# Altium PCB DevKit.PcbDoc (part 1 of 2)
Units mil, origin at the board's own origin, x right, y up, seen from the top; angles counter-clockwise.
Board outline 6000 x 4000 mil, 2 copper layers (Top Layer, Bottom Layer); 69 components, 227 nets, 1587 pads, 0 vias.
Unrouted connection lines stored in the file: 824.
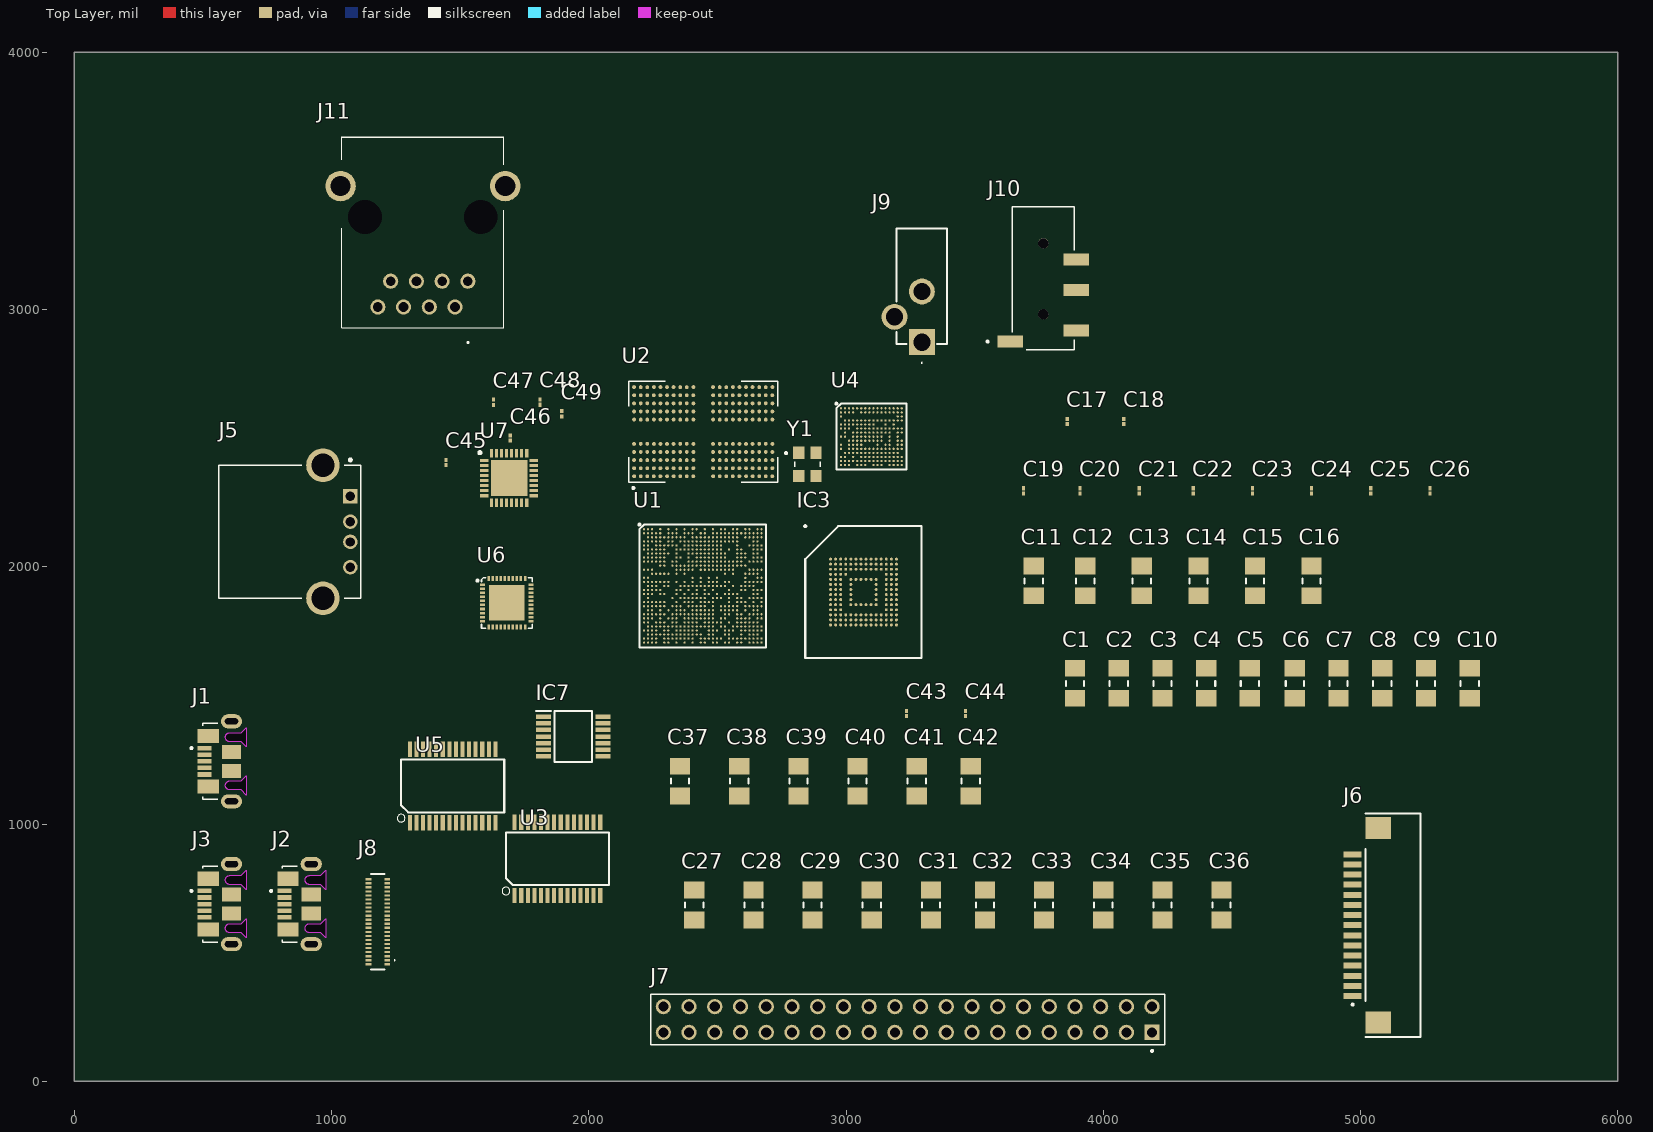
[diagram p0: Top Layer view]
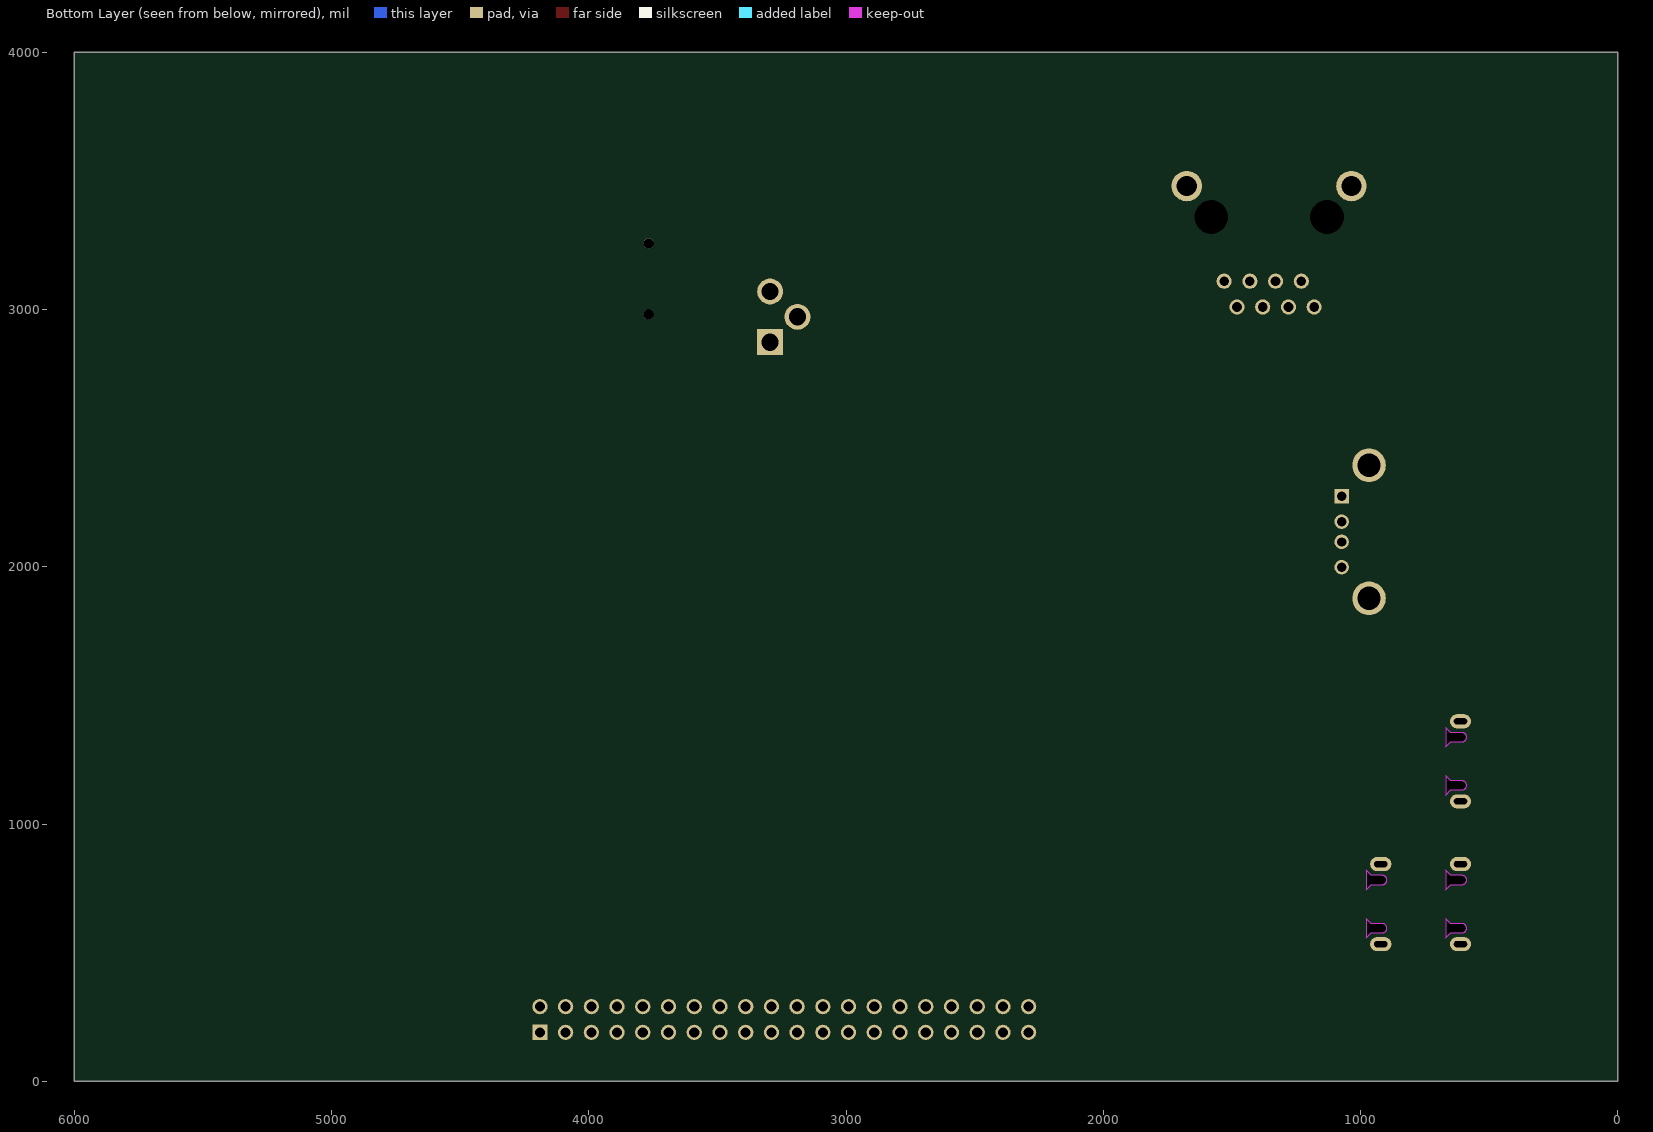
[diagram p1: Bottom Layer view, seen from below]

## Layer stack, top to bottom
Top Solder: solder mask 0.4, Solder Resist, Dk 3.5
Top Layer: signal copper 1.4
Dielectric 1: dielectric 12.6, FR-4, Dk 4.8
Bottom Layer: signal copper 1.4
Bottom Solder: solder mask 0.4, Solder Resist, Dk 3.5

## Board outline
0,0 6000,0 6000,4000 0,4000

## Design rules (kind name [scope] priority, off if disabled: settings)
Clearance [All] p1: gap=10 ignorepadtopadclearanceinfootprint=FALSE except(4: SMDPad-SMDPad)
DiffPairsRouting [All] p1: maxlimit=10 minlimit=10 mostfreqgap=10 toplayer_minwidth=15 toplayer_maxwidth=15 toplayer_prefwidth=15 bottomlayer_minwidth=15 bottomlayer_maxwidth=15 bottomlayer_prefwidth=15 maxuncoupledlength=500
PolygonConnect [All] p1: connectstyle=Relief reliefconductorwidth=10 reliefentries=4 polygonreliefangle="90 Angle" airgapwidth=10
RoutingVias [All] p1: holewidth=28 width=50 viastyle="Through Hole" minholewidth=28 minwidth=50 maxholewidth=28 maxwidth=50
SolderMaskExpansion [All] p1: expansion=4 istentingtop=FALSE
SupplyNets "Schematic Supply Nets_12" [InNet('+5')] p1: voltage=0.000
SupplyNets "Schematic Supply Nets_9" [InNet('AVDD33')] p2: voltage=0.000
SupplyNets "Schematic Supply Nets_18" [InNet('AAVDD28_FM')] p3: voltage=0.000
SupplyNets "Schematic Supply Nets_16" [InNet('AAVDD18_GPS')] p4: voltage=0.000
SupplyNets "Schematic Supply Nets_15" [InNet('VDRAM2')] p5: voltage=0.000
SupplyNets "Schematic Supply Nets_14" [InNet('VDRAM1')] p6: voltage=0.000
SupplyNets "Schematic Supply Nets_11" [InNet('VIO18')] p7: voltage=0.000
SupplyNets "Schematic Supply Nets_10" [InNet('VSRAM_OTHERS')] p8: voltage=0.000
SupplyNets "Schematic Supply Nets_8" [InNet('VEMC')] p9: voltage=0.000
SupplyNets "Schematic Supply Nets_7" [InNet('VPROC')] p10: voltage=0.000
SupplyNets "Schematic Supply Nets_6" [InNet('VMODEM')] p11: voltage=0.000
SupplyNets "Schematic Supply Nets_5" [InNet('VS1')] p12: voltage=0.000
SupplyNets "Schematic Supply Nets_4" [InNet('VPA')] p13: voltage=0.000
SupplyNets "Schematic Supply Nets_3" [InNet('VCORE')] p14: voltage=0.000
SupplyNets "Schematic Supply Nets_2" [InNet('GND')] p15: voltage=0.000
SupplyNets "Schematic Supply Nets_1" [InNet('VSYS')] p16: voltage=0.000
SupplyNets "Schematic Supply Nets" [InNet('EMI0_A0')] p17: voltage=0.000
Width [All] p1: maxlimit=10 minlimit=10 preferedwidth=10
29 further rules are at their usual default settings.

## Classes and differential pairs
component class Connectivity: R?
component class Other: R12
component class "RTC & Miscellaneous Features": C87 C89 R8 R9 R10 R11 Y1
component class "Digital GND": C64 C65 C66 C67 C68 C69 C70 C71 C72 C73 C74 C75 C76 C77 C78 C79 J10 L1 L2 L3 L4 L5 L6 L7 L8 L9 R5 R6 R7
component class Designator: J8
component class USB: J1 J5
component class CAMERA: J6
component class "Control & Interface Signals": R1 R2 S1
component class RJ45: C45 C46 C47 C48 C49 J11 U7
component class Wifi: U6
component class UART: J2 J3 U3 U5
component class Nguồn: J9
component class "Power supply": U4
component class Ground: U2
component class GPIO: IC7 J7
component class ROM: IC3
component class "Power Supply": C1 C2 C3 C4 C5 C6 C7 C8 C9 C10 C11 C12 C13 C14 C15 C16 C17 C18 C19 C20 C21 C22 C23 C24 C25 C26 C27 C28 C29 C30 C31 C32 C33 C34 C35 C36 C37 C38 C39 C40 C41 C42 C43 C44 U1
differential pair USB_1: +USB_1_P -USB_1_N
differential pair USB_0: +USB_0_P -USB_0_N
differential pair USB1: +USB1_P -USB1_N
differential pair USB0: +USB0_P -USB0_N

## Components (designator, comment, footprint, x,y, rotation, side; value= is the part's Value field where it differs from the comment)
C1 "GRM31CR60J107ME39L" CAPC3216X190X55ML30T25 3890,1546.93 r90 top
C2 "GRM31CR60J107ME39L" CAPC3216X190X55ML30T25 4060,1546.93 r90 top
C3 "GRM31CR60J107ME39L" CAPC3216X190X55ML30T25 4230,1546.93 r90 top
C4 "GRM31CR60J107ME39L" CAPC3216X190X55ML30T25 4400,1546.93 r90 top
C5 "GRM31CR60J107ME39L" CAPC3216X190X55ML30T25 4570,1546.93 r90 top
C6 "GRM31CR60J107ME39L" CAPC3216X190X55ML30T25 4745,1546.93 r90 top
C7 "GRM31CR60J107ME39L" CAPC3216X190X55ML30T25 4915,1546.93 r90 top
C8 "GRM31CR60J107ME39L" CAPC3216X190X55ML30T25 5085,1546.93 r90 top
C9 "GRM31CR60J107ME39L" CAPC3216X190X55ML30T25 5255,1546.93 r90 top
C10 "GRM31CR60J107ME39L" CAPC3216X190X55ML30T25 5425,1546.93 r90 top
C11 "GRM31CR60J107ME39L" CAPC3216X190X55ML30T25 3730,1945 r90 top
C12 "GRM31CR60J107ME39L" CAPC3216X190X55ML30T25 3930,1945 r90 top
C13 "GRM31CR60J107ME39L" CAPC3216X190X55ML30T25 4150,1945 r90 top
C14 "GRM31CR60J107ME39L" CAPC3216X190X55ML30T25 4370,1945 r90 top
C15 "GRM31CR60J107ME39L" CAPC3216X190X55ML30T25 4590,1945 r90 top
C16 "GRM31CR60J107ME39L" CAPC3216X190X55ML30T25 4810,1945 r90 top
C17 "GRM033R60J104KE19D" CAPC0603X33X15LL03T05 3860,2565 r90 top
C18 "GRM033R60J104KE19D" CAPC0603X33X15LL03T05 4080,2565 r90 top
C19 "GRM033R60J104KE19D" CAPC0603X33X15LL03T05 3690,2295 r90 top
C20 "GRM033R60J104KE19D" CAPC0603X33X15LL03T05 3910,2295 r90 top
C21 "GRM033R60J104KE19D" CAPC0603X33X15LL03T05 4140,2295 r90 top
C22 "GRM033R60J104KE19D" CAPC0603X33X15LL03T05 4350,2295 r90 top
C23 "GRM033R60J104KE19D" CAPC0603X33X15LL03T05 4580,2295 r90 top
C24 "GRM033R60J104KE19D" CAPC0603X33X15LL03T05 4810,2295 r90 top
C25 "GRM033R60J104KE19D" CAPC0603X33X15LL03T05 5040,2295 r90 top
C26 "GRM033R60J104KE19D" CAPC0603X33X15LL03T05 5270,2295 r90 top
C27 "GRM31CR60J107ME39L" CAPC3216X190X55ML30T25 2410,685 r90 top
C28 "GRM31CR60J107ME39L" CAPC3216X190X55ML30T25 2640,685 r90 top
C29 "GRM31CR60J107ME39L" CAPC3216X190X55ML30T25 2870,685 r90 top
C30 "GRM31CR60J107ME39L" CAPC3216X190X55ML30T25 3100,685 r90 top
C31 "GRM31CR60J107ME39L" CAPC3216X190X55ML30T25 3330,685 r90 top
C32 "GRM31CR60J107ME39L" CAPC3216X190X55ML30T25 3540,685 r90 top
C33 "GRM31CR60J107ME39L" CAPC3216X190X55ML30T25 3770,685 r90 top
C34 "GRM31CR60J107ME39L" CAPC3216X190X55ML30T25 4000,685 r90 top
C35 "GRM31CR60J107ME39L" CAPC3216X190X55ML30T25 4230,685 r90 top
C36 "GRM31CR60J107ME39L" CAPC3216X190X55ML30T25 4460,685 r90 top
C37 "GRM31CR60J107ME39L" CAPC3216X190X55ML30T25 2355,1166.93 r90 top
C38 "GRM31CR60J107ME39L" CAPC3216X190X55ML30T25 2585,1166.93 r90 top
C39 "GRM31CR60J107ME39L" CAPC3216X190X55ML30T25 2815,1166.93 r90 top
C40 "GRM31CR60J107ME39L" CAPC3216X190X55ML30T25 3045,1166.93 r90 top
C41 "GRM31CR60J107ME39L" CAPC3216X190X55ML30T25 3275,1166.93 r90 top
C42 "GRM31CR60J107ME39L" CAPC3216X190X55ML30T25 3485,1166.93 r90 top
C43 "GRM033R60J104KE19D" CAPC0603X33X15LL03T05 3235,1429.76 r90 top
C44 "GRM033R60J104KE19D" CAPC0603X33X15LL03T05 3465,1429.76 r90 top
C45 "GRM033R60J104KE19D" CAPC0603X33X15LL03T05 1445,2405 r90 top
C46 "GRM033R60J104KE19D" CAPC0603X33X15LL03T05 1695,2500.24 r90 top
C47 "GRM033R60J104KE19D" CAPC0603X33X15LL03T05 1630,2639.76 r90 top
C48 "GRM033R60J104KE19D" CAPC0603X33X15LL03T05 1810,2640 r90 top
C49 "GRM033R60J104KE19D" CAPC0603X33X15LL03T05 1895,2594.76 r90 top
IC3 "KLMAG1JETD-B041" BGA153C50P14X14_1150X1300X80 3067.95,1901.73 r0 top
IC7 "TXB0104PWR" SOP65P640X120-14N 1940,1340 r0 top
J1 "1932788-1" TE_1932788-1 560,1245 r90 top
J2 "1932788-1" TE_1932788-1 870,690 r90 top
J3 "1932788-1" TE_1932788-1 560,690 r90 top
J5 "6364372-2" TE_6364372-2 840,2145 r270 top
J6 "ZF1-15-01-X-WT-XX" SAMTEC_ZF1-15-01-X-WT-XX 5095,590 r90 top
J7 "2-826656-0" TE_2-826656-0 3309.67,242.41 r180 top
J8 "WP7B-P040VA1-R8000" WP7BP040VA1R8000 1180,620 r90 top
J9 "DC-002-2.0A-1.0" DC00220A10 3295,2873.15 r270 top
J10 "PJ-320D-A" HRO_PJ-320D-A 3765,3125 r270 top
J11 "RJ45-8Z4" RJ458Z4 1530,3110 r270 top
U1 "MT8365V_BZB" BGA633C40P30X29_1220X1180X90 2443.15,1925.51 r0 top
U2 "K4UBE3D4AA-MGCL" K4F8E304HB-MGCJ 2445,2525 r90 top
U3 "FT232RL" FT232RL 1885,860 r0 top
U4 "MT6358W_A" BGA194C40P16X15_640X600X66 3098.62,2505.75 r0 top
U5 "FT232RL" FT232RL 1477.46,1143.29 r0 top
U6 "MT6631" MT6631 1681.38,1859.49 r0 top
U7 "RTL8201F-VB-CG" RTL8201F 1690,2345 r0 top
Y1 "26MHZ" OSCCC320X250X90N 2850,2395 r0 top

## Footprints (in the part's own frame and the unit in brackets; to place one, negate y for a bottom-side part, rotate by r counter-clockwise, add the part's x,y. Pads: shape width x height; smd on the part's side, far side on the other; paste and mask are expansions set on the pad)
BGA153C50P14X14_1150X1300X80 [mm]
  round 0.29 smd: A1(-3.25,3.25) A2(-2.75,3.25) A3(-2.25,3.25) A4(-1.75,3.25) A5(-1.25,3.25) A6(-0.75,3.25) A7(-0.25,3.25) A8(0.25,3.25) A9(0.75,3.25) A10(1.25,3.25) A11(1.75,3.25) A12(2.25,3.25) A13(2.75,3.25) A14(3.25,3.25) B1(-3.25,2.75) B2(-2.75,2.75) B3(-2.25,2.75) B4(-1.75,2.75) B5(-1.25,2.75) B6(-0.75,2.75) B7(-0.25,2.75) B8(0.25,2.75) B9(0.75,2.75) B10(1.25,2.75) B11(1.75,2.75) B12(2.25,2.75) B13(2.75,2.75) B14(3.25,2.75) C1(-3.25,2.25) C2(-2.75,2.25) C3(-2.25,2.25) C4(-1.75,2.25) C5(-1.25,2.25) C6(-0.75,2.25) C7(-0.25,2.25) C8(0.25,2.25) C9(0.75,2.25) C10(1.25,2.25) C11(1.75,2.25) C12(2.25,2.25) C13(2.75,2.25) C14(3.25,2.25) D1(-3.25,1.75) D2(-2.75,1.75) D3(-2.25,1.75) D4(-1.75,1.75) D12(2.25,1.75) D13(2.75,1.75) D14(3.25,1.75) E1(-3.25,1.25) E2(-2.75,1.25) E3(-2.25,1.25) E5(-1.25,1.25) E6(-0.75,1.25) E7(-0.25,1.25) E8(0.25,1.25) E9(0.75,1.25) E10(1.25,1.25) E12(2.25,1.25) E13(2.75,1.25) E14(3.25,1.25) F1(-3.25,0.75) F2(-2.75,0.75) F3(-2.25,0.75) F5(-1.25,0.75) F10(1.25,0.75) F12(2.25,0.75) F13(2.75,0.75) F14(3.25,0.75) G1(-3.25,0.25) G2(-2.75,0.25) G3(-2.25,0.25) G5(-1.25,0.25) G10(1.25,0.25) G12(2.25,0.25) G13(2.75,0.25) G14(3.25,0.25) H1(-3.25,-0.25) H2(-2.75,-0.25) H3(-2.25,-0.25) H5(-1.25,-0.25) H10(1.25,-0.25) H12(2.25,-0.25) H13(2.75,-0.25) H14(3.25,-0.25) J1(-3.25,-0.75) J2(-2.75,-0.75) J3(-2.25,-0.75) J5(-1.25,-0.75) J10(1.25,-0.75) J12(2.25,-0.75) J13(2.75,-0.75) J14(3.25,-0.75) K1(-3.25,-1.25) K2(-2.75,-1.25) K3(-2.25,-1.25) K5(-1.25,-1.25) K6(-0.75,-1.25) K7(-0.25,-1.25) K8(0.25,-1.25) K9(0.75,-1.25) K10(1.25,-1.25) K12(2.25,-1.25) K13(2.75,-1.25) K14(3.25,-1.25) L1(-3.25,-1.75) L2(-2.75,-1.75) L3(-2.25,-1.75) L12(2.25,-1.75) L13(2.75,-1.75) L14(3.25,-1.75) M1(-3.25,-2.25) M2(-2.75,-2.25) M3(-2.25,-2.25) M4(-1.75,-2.25) M5(-1.25,-2.25) M6(-0.75,-2.25) M7(-0.25,-2.25) M8(0.25,-2.25) M9(0.75,-2.25) M10(1.25,-2.25) M11(1.75,-2.25) M12(2.25,-2.25) M13(2.75,-2.25) M14(3.25,-2.25) N1(-3.25,-2.75) N2(-2.75,-2.75) N3(-2.25,-2.75) N4(-1.75,-2.75) N5(-1.25,-2.75) N6(-0.75,-2.75) N7(-0.25,-2.75) N8(0.25,-2.75) N9(0.75,-2.75) N10(1.25,-2.75) N11(1.75,-2.75) N12(2.25,-2.75) N13(2.75,-2.75) N14(3.25,-2.75) P1(-3.25,-3.25) P2(-2.75,-3.25) P3(-2.25,-3.25) P4(-1.75,-3.25) P5(-1.25,-3.25) P6(-0.75,-3.25) P7(-0.25,-3.25) P8(0.25,-3.25) P9(0.75,-3.25) P10(1.25,-3.25) P11(1.75,-3.25) P12(2.25,-3.25) P13(2.75,-3.25) P14(3.25,-3.25)
  silkscreen extent -5.85,-6.5 5.75,6.6, body extent -5.75,-6.5 5.75,6.5, height 0.8
BGA194C40P16X15_640X600X66 [mm]
  round 0.22 smd: A1(-3,2.8) A2(-2.6,2.8) A3(-2.2,2.8) A4(-1.8,2.8) A5(-1.4,2.8) A6(-1,2.8) A7(-0.6,2.8) A8(-0.2,2.8) A9(0.2,2.8) A10(0.6,2.8) A11(1,2.8) A12(1.4,2.8) A13(1.8,2.8) A14(2.2,2.8) A15(2.6,2.8) A16(3,2.8) B1(-3,2.4) B2(-2.6,2.4) B3(-2.2,2.4) B4(-1.8,2.4) B6(-1,2.4) B7(-0.6,2.4) B8(-0.2,2.4) B9(0.2,2.4) B10(0.6,2.4) B11(1,2.4) B12(1.4,2.4) B13(1.8,2.4) B14(2.2,2.4) B15(2.6,2.4) B16(3,2.4) C1(-3,2) C15(2.6,2) C16(3,2) D2(-2.6,1.6) D3(-2.2,1.6) D4(-1.8,1.6) D5(-1.4,1.6) D6(-1,1.6) D7(-0.6,1.6) D8(-0.2,1.6) D9(0.2,1.6) D10(0.6,1.6) D11(1,1.6) D12(1.4,1.6) D13(1.8,1.6) D14(2.2,1.6) D15(2.6,1.6) D16(3,1.6) E1(-3,1.2) E2(-2.6,1.2) E3(-2.2,1.2) E4(-1.8,1.2) E5(-1.4,1.2) E6(-1,1.2) E7(-0.6,1.2) E8(-0.2,1.2) E9(0.2,1.2) E12(1.4,1.2) E14(2.2,1.2) F1(-3,0.8) F2(-2.6,0.8) F3(-2.2,0.8) F5(-1.4,0.8) F6(-1,0.8) F7(-0.6,0.8) F8(-0.2,0.8) F9(0.2,0.8) F10(0.6,0.8) F11(1,0.8) F12(1.4,0.8) F13(1.8,0.8) F14(2.2,0.8) F15(2.6,0.8) F16(3,0.8) G2(-2.6,0.4) G4(-1.8,0.4) G5(-1.4,0.4) G6(-1,0.4) G7(-0.6,0.4) G8(-0.2,0.4) G9(0.2,0.4) G10(0.6,0.4) G11(1,0.4) G12(1.4,0.4) G13(1.8,0.4) G15(2.6,0.4) G16(3,0.4) H1(-3,0) H2(-2.6,0) H4(-1.8,0) H5(-1.4,0) H6(-1,0) H7(-0.6,0) H8(-0.2,0) H9(0.2,0) H10(0.6,0) H11(1,0) H13(1.8,0) H15(2.6,0) J3(-2.2,-0.4) J4(-1.8,-0.4) J5(-1.4,-0.4) J6(-1,-0.4) J7(-0.6,-0.4) J8(-0.2,-0.4) J9(0.2,-0.4) J10(0.6,-0.4) J11(1,-0.4) J13(1.8,-0.4) J15(2.6,-0.4) J16(3,-0.4) K1(-3,-0.8) K3(-2.2,-0.8) K4(-1.8,-0.8) K5(-1.4,-0.8) K6(-1,-0.8) K10(0.6,-0.8) K12(1.4,-0.8) K13(1.8,-0.8) K15(2.6,-0.8) K16(3,-0.8) L1(-3,-1.2) L3(-2.2,-1.2) L4(-1.8,-1.2) L5(-1.4,-1.2) L6(-1,-1.2) L7(-0.6,-1.2) L8(-0.2,-1.2) L9(0.2,-1.2) L10(0.6,-1.2) L11(1,-1.2) L12(1.4,-1.2) L13(1.8,-1.2) L14(2.2,-1.2) L15(2.6,-1.2) L16(3,-1.2) M2(-2.6,-1.6) M3(-2.2,-1.6) M4(-1.8,-1.6) M5(-1.4,-1.6) M6(-1,-1.6) M7(-0.6,-1.6) M8(-0.2,-1.6) M9(0.2,-1.6) M10(0.6,-1.6) M11(1,-1.6) M12(1.4,-1.6) M13(1.8,-1.6) M14(2.2,-1.6) M15(2.6,-1.6) N1(-3,-2) N2(-2.6,-2) N4(-1.8,-2) N6(-1,-2) N7(-0.6,-2) N8(-0.2,-2) N9(0.2,-2) N10(0.6,-2) N11(1,-2) N12(1.4,-2) N13(1.8,-2) N14(2.2,-2) N15(2.6,-2) N16(3,-2) P1(-3,-2.4) P2(-2.6,-2.4) P3(-2.2,-2.4) P4(-1.8,-2.4) P5(-1.4,-2.4) P6(-1,-2.4) P7(-0.6,-2.4) P8(-0.2,-2.4) P9(0.2,-2.4) P10(0.6,-2.4) P11(1,-2.4) P12(1.4,-2.4) P13(1.8,-2.4) P14(2.2,-2.4) P15(2.6,-2.4) P16(3,-2.4) R1(-3,-2.8) R2(-2.6,-2.8) R3(-2.2,-2.8) R5(-1.4,-2.8) R6(-1,-2.8) R7(-0.6,-2.8) R9(0.2,-2.8) R10(0.6,-2.8) R11(1,-2.8) R13(1.8,-2.8) R14(2.2,-2.8) R15(2.6,-2.8) R16(3,-2.8)
  silkscreen extent -3.56,-3.26 3.46,3.36, body extent -3.2,-3 3.2,3, height 0.66
BGA633C40P30X29_1220X1180X90 [mm]
  round 0.216 smd: A1(-5.8,5.6) A2(-5.4,5.6) A3(-5,5.6) A5(-4.2,5.6) A7(-3.4,5.6) A9(-2.6,5.6) A11(-1.8,5.6) A13(-1,5.6) A14(-0.6,5.6) A16(0.2,5.6) A18(1,5.6) A20(1.8,5.6) A21(2.2,5.6) A23(3,5.6) A24(3.4,5.6) A26(4.2,5.6) A27(4.6,5.6) A29(5.4,5.6) A30(5.8,5.6) AA2(-5.4,-2.4) AA3(-5,-2.4) AA5(-4.2,-2.4) AA7(-3.4,-2.4) AA9(-2.6,-2.4) AA10(-2.2,-2.4) AA11(-1.8,-2.4) AA13(-1,-2.4) AA14(-0.6,-2.4) AA15(-0.2,-2.4) AA16(0.2,-2.4) AA17(0.6,-2.4) AA18(1,-2.4) AA20(1.8,-2.4) AA21(2.2,-2.4) AA22(2.6,-2.4) AA23(3,-2.4) AA24(3.4,-2.4) AA26(4.2,-2.4) AA28(5,-2.4) AA29(5.4,-2.4) AB1(-5.8,-2.8) AB2(-5.4,-2.8) AB3(-5,-2.8) AB4(-4.6,-2.8) AB5(-4.2,-2.8) AB6(-3.8,-2.8) AB8(-3,-2.8) AB9(-2.6,-2.8) AB10(-2.2,-2.8) AB11(-1.8,-2.8) AB12(-1.4,-2.8) AB13(-1,-2.8) AB14(-0.6,-2.8) AB15(-0.2,-2.8) AB16(0.2,-2.8) AB17(0.6,-2.8) AB18(1,-2.8) AB21(2.2,-2.8) AB22(2.6,-2.8) AB24(3.4,-2.8) AB25(3.8,-2.8) AB27(4.6,-2.8) AB28(5,-2.8) AB29(5.4,-2.8) AB30(5.8,-2.8) AC1(-5.8,-3.2) AC2(-5.4,-3.2) AC3(-5,-3.2) AC5(-4.2,-3.2) AC7(-3.4,-3.2) AC8(-3,-3.2) AC9(-2.6,-3.2) AC11(-1.8,-3.2) AC12(-1.4,-3.2) AC13(-1,-3.2) AC14(-0.6,-3.2) AC15(-0.2,-3.2) AC16(0.2,-3.2) AC17(0.6,-3.2) AC18(1,-3.2) AC20(1.8,-3.2) AC21(2.2,-3.2) AC24(3.4,-3.2) AC25(3.8,-3.2) AC26(4.2,-3.2) AC27(4.6,-3.2) AC29(5.4,-3.2) AC30(5.8,-3.2) AD1(-5.8,-3.6) AD2(-5.4,-3.6) AD4(-4.6,-3.6) AD5(-4.2,-3.6) AD6(-3.8,-3.6) AD8(-3,-3.6) AD9(-2.6,-3.6) AD11(-1.8,-3.6) AD12(-1.4,-3.6) AD13(-1,-3.6) AD14(-0.6,-3.6) AD16(0.2,-3.6) AD17(0.6,-3.6) AD18(1,-3.6) AD19(1.4,-3.6) AD20(1.8,-3.6) AD22(2.6,-3.6) AD24(3.4,-3.6) AD25(3.8,-3.6) AD26(4.2,-3.6) AD27(4.6,-3.6) AD28(5,-3.6) AD29(5.4,-3.6) AE2(-5.4,-4) AE3(-5,-4) AE4(-4.6,-4) AE5(-4.2,-4) AE6(-3.8,-4) AE7(-3.4,-4) AE8(-3,-4) AE9(-2.6,-4) AE10(-2.2,-4) AE11(-1.8,-4) AE12(-1.4,-4) AE13(-1,-4) AE14(-0.6,-4) AE15(-0.2,-4) AE16(0.2,-4) AE17(0.6,-4) AE18(1,-4) AE20(1.8,-4) AE21(2.2,-4) AE23(3,-4) AE24(3.4,-4) AE25(3.8,-4) AE26(4.2,-4) AE27(4.6,-4) AE28(5,-4) AE29(5.4,-4) AE30(5.8,-4) AF1(-5.8,-4.4) AF2(-5.4,-4.4) AF3(-5,-4.4) AF4(-4.6,-4.4) AF6(-3.8,-4.4) AF7(-3.4,-4.4) AF9(-2.6,-4.4) AF10(-2.2,-4.4) AF11(-1.8,-4.4) AF12(-1.4,-4.4) AF13(-1,-4.4) AF14(-0.6,-4.4) AF17(0.6,-4.4) AF18(1,-4.4) AF19(1.4,-4.4) AF21(2.2,-4.4) AF22(2.6,-4.4) AF23(3,-4.4) AF25(3.8,-4.4) AF26(4.2,-4.4) AF27(4.6,-4.4) AF28(5,-4.4) AF29(5.4,-4.4) AF30(5.8,-4.4) AG2(-5.4,-4.8) AG3(-5,-4.8) AG4(-4.6,-4.8) AG5(-4.2,-4.8) AG6(-3.8,-4.8) AG7(-3.4,-4.8) AG8(-3,-4.8) AG9(-2.6,-4.8) AG10(-2.2,-4.8) AG11(-1.8,-4.8) AG12(-1.4,-4.8) AG13(-1,-4.8) AG14(-0.6,-4.8) AG15(-0.2,-4.8) AG17(0.6,-4.8) AG18(1,-4.8) AG21(2.2,-4.8) AG22(2.6,-4.8) AG25(3.8,-4.8) AG27(4.6,-4.8) AG28(5,-4.8) AG29(5.4,-4.8) AH1(-5.8,-5.2) AH2(-5.4,-5.2) AH3(-5,-5.2) AH4(-4.6,-5.2) AH6(-3.8,-5.2) AH7(-3.4,-5.2) AH8(-3,-5.2) AH9(-2.6,-5.2) AH10(-2.2,-5.2) AH11(-1.8,-5.2) AH12(-1.4,-5.2) AH13(-1,-5.2) AH15(-0.2,-5.2) AH16(0.2,-5.2) AH17(0.6,-5.2) AH18(1,-5.2) AH19(1.4,-5.2) AH20(1.8,-5.2) AH22(2.6,-5.2) AH23(3,-5.2) AH24(3.4,-5.2) AH25(3.8,-5.2) AH26(4.2,-5.2) AH27(4.6,-5.2) AH28(5,-5.2) AH29(5.4,-5.2) AH30(5.8,-5.2) AJ1(-5.8,-5.6) AJ2(-5.4,-5.6) AJ3(-5,-5.6) AJ4(-4.6,-5.6) AJ6(-3.8,-5.6) AJ7(-3.4,-5.6) AJ9(-2.6,-5.6) AJ11(-1.8,-5.6) AJ13(-1,-5.6) AJ15(-0.2,-5.6) AJ16(0.2,-5.6) AJ18(1,-5.6) AJ19(1.4,-5.6) AJ21(2.2,-5.6) AJ22(2.6,-5.6) AJ24(3.4,-5.6) AJ25(3.8,-5.6) AJ27(4.6,-5.6) AJ28(5,-5.6) AJ29(5.4,-5.6) AJ30(5.8,-5.6) B1(-5.8,5.2) B2(-5.4,5.2) B3(-5,5.2) B4(-4.6,5.2) B5(-4.2,5.2) B7(-3.4,5.2) B8(-3,5.2) B9(-2.6,5.2) B11(-1.8,5.2) B12(-1.4,5.2) B13(-1,5.2) B15(-0.2,5.2) B16(0.2,5.2) B18(1,5.2) B19(1.4,5.2) B20(1.8,5.2) B21(2.2,5.2) B22(2.6,5.2) B23(3,5.2) B24(3.4,5.2) B25(3.8,5.2) B26(4.2,5.2) B27(4.6,5.2) B28(5,5.2) B29(5.4,5.2) B30(5.8,5.2) C2(-5.4,4.8) C3(-5,4.8) C4(-4.6,4.8) C5(-4.2,4.8) C6(-3.8,4.8) C7(-3.4,4.8) C8(-3,4.8) C9(-2.6,4.8) C10(-2.2,4.8) C11(-1.8,4.8) C13(-1,4.8) C14(-0.6,4.8) C15(-0.2,4.8) C16(0.2,4.8) C17(0.6,4.8) C18(1,4.8) C19(1.4,4.8) C20(1.8,4.8) C21(2.2,4.8) C22(2.6,4.8) C23(3,4.8) C24(3.4,4.8) C26(4.2,4.8) C27(4.6,4.8) C28(5,4.8) C29(5.4,4.8) C30(5.8,4.8) D1(-5.8,4.4) D2(-5.4,4.4) D3(-5,4.4) D4(-4.6,4.4) D5(-4.2,4.4) D7(-3.4,4.4) D8(-3,4.4) D10(-2.2,4.4) D11(-1.8,4.4) D12(-1.4,4.4) D13(-1,4.4) D14(-0.6,4.4) D15(-0.2,4.4) D16(0.2,4.4) D17(0.6,4.4) D18(1,4.4) D19(1.4,4.4) D20(1.8,4.4) D21(2.2,4.4) D22(2.6,4.4) D23(3,4.4) D24(3.4,4.4) D28(5,4.4) D29(5.4,4.4) E1(-5.8,4) E2(-5.4,4) E4(-4.6,4) E5(-4.2,4) E6(-3.8,4) E7(-3.4,4) E8(-3,4) E9(-2.6,4) E11(-1.8,4) E12(-1.4,4) E13(-1,4) E14(-0.6,4) E15(-0.2,4) E16(0.2,4) E17(0.6,4) E18(1,4) E19(1.4,4) E20(1.8,4) E24(3.4,4) E27(4.6,4) E28(5,4) E29(5.4,4) E30(5.8,4) F1(-5.8,3.6) F2(-5.4,3.6) F3(-5,3.6) F4(-4.6,3.6) F5(-4.2,3.6) F6(-3.8,3.6) F9(-2.6,3.6) F10(-2.2,3.6) F11(-1.8,3.6) F12(-1.4,3.6) F13(-1,3.6) F14(-0.6,3.6) F15(-0.2,3.6) F16(0.2,3.6) F17(0.6,3.6) F18(1,3.6) F19(1.4,3.6) F20(1.8,3.6) F22(2.6,3.6) F24(3.4,3.6) F25(3.8,3.6) F28(5,3.6) F29(5.4,3.6) F30(5.8,3.6) G2(-5.4,3.2) G3(-5,3.2) G4(-4.6,3.2) G5(-4.2,3.2) G6(-3.8,3.2) G7(-3.4,3.2) G9(-2.6,3.2) G12(-1.4,3.2) G13(-1,3.2) G14(-0.6,3.2) G15(-0.2,3.2) G16(0.2,3.2) G17(0.6,3.2) G18(1,3.2) G19(1.4,3.2) G20(1.8,3.2) G21(2.2,3.2) G24(3.4,3.2) G25(3.8,3.2) G26(4.2,3.2) G28(5,3.2) G29(5.4,3.2) H1(-5.8,2.8) H2(-5.4,2.8) H3(-5,2.8) H4(-4.6,2.8) H5(-4.2,2.8) H6(-3.8,2.8) H9(-2.6,2.8) H10(-2.2,2.8) H12(-1.4,2.8) H14(-0.6,2.8) H15(-0.2,2.8) H16(0.2,2.8) H17(0.6,2.8) H18(1,2.8) H19(1.4,2.8) H20(1.8,2.8) H21(2.2,2.8) H24(3.4,2.8) H25(3.8,2.8) H26(4.2,2.8) H28(5,2.8) H29(5.4,2.8) H30(5.8,2.8) J1(-5.8,2.4) J2(-5.4,2.4) J3(-5,2.4) J4(-4.6,2.4) J5(-4.2,2.4) J6(-3.8,2.4) J8(-3,2.4) J9(-2.6,2.4) J12(-1.4,2.4) J13(-1,2.4) J14(-0.6,2.4) J15(-0.2,2.4) J16(0.2,2.4) J17(0.6,2.4) J18(1,2.4) J19(1.4,2.4) J20(1.8,2.4) J21(2.2,2.4) J22(2.6,2.4) J23(3,2.4) J24(3.4,2.4) J25(3.8,2.4) J27(4.6,2.4) J28(5,2.4) J29(5.4,2.4) J30(5.8,2.4) K5(-4.2,2) K6(-3.8,2) K8(-3,2) K9(-2.6,2) K10(-2.2,2) K11(-1.8,2) K12(-1.4,2) K13(-1,2) K14(-0.6,2) K15(-0.2,2) K16(0.2,2) K17(0.6,2) K18(1,2) K19(1.4,2) K20(1.8,2) K21(2.2,2) K22(2.6,2) K23(3,2) K24(3.4,2) K25(3.8,2) K26(4.2,2) L1(-5.8,1.6) L2(-5.4,1.6) L3(-5,1.6) L9(-2.6,1.6) L10(-2.2,1.6) L11(-1.8,1.6) L12(-1.4,1.6) L13(-1,1.6) L15(-0.2,1.6) L16(0.2,1.6) L17(0.6,1.6) L18(1,1.6) L19(1.4,1.6) L20(1.8,1.6) L21(2.2,1.6) L22(2.6,1.6) L23(3,1.6) L27(4.6,1.6) L28(5,1.6) L29(5.4,1.6) L30(5.8,1.6) M3(-5,1.2) M4(-4.6,1.2) M5(-4.2,1.2) M6(-3.8,1.2) M7(-3.4,1.2) M9(-2.6,1.2) M11(-1.8,1.2) M21(2.2,1.2) M23(3,1.2) M26(4.2,1.2) M27(4.6,1.2) M28(5,1.2) M29(5.4,1.2) N1(-5.8,0.8) N2(-5.4,0.8) N13(-1,0.8) N15(-0.2,0.8) N17(0.6,0.8) N19(1.4,0.8) N26(4.2,0.8) N29(5.4,0.8) N30(5.8,0.8) P1(-5.8,0.4) P2(-5.4,0.4) P3(-5,0.4) P4(-4.6,0.4) P5(-4.2,0.4) P6(-3.8,0.4) P7(-3.4,0.4) P9(-2.6,0.4) P11(-1.8,0.4) P13(-1,0.4) P15(-0.2,0.4) P17(0.6,0.4) P18(1,0.4) P19(1.4,0.4) P21(2.2,0.4) P22(2.6,0.4) P26(4.2,0.4) P27(4.6,0.4) P28(5,0.4) P29(5.4,0.4) P30(5.8,0.4) R2(-5.4,0) R3(-5,0) R4(-4.6,0) R6(-3.8,0) R7(-3.4,0) R10(-2.2,0) R11(-1.8,0) R12(-1.4,0) R13(-1,0) R14(-0.6,0) R15(-0.2,0) R16(0.2,0) R17(0.6,0) R18(1,0) R19(1.4,0) R20(1.8,0) R21(2.2,0) R23(3,0) R25(3.8,0) R26(4.2,0) R27(4.6,0) R28(5,0) T1(-5.8,-0.4) T2(-5.4,-0.4) T3(-5,-0.4) T4(-4.6,-0.4) T5(-4.2,-0.4) T9(-2.6,-0.4) T10(-2.2,-0.4) T12(-1.4,-0.4) T14(-0.6,-0.4) T16(0.2,-0.4) T18(1,-0.4) T22(2.6,-0.4) T25(3.8,-0.4) T26(4.2,-0.4) T28(5,-0.4) T29(5.4,-0.4) T30(5.8,-0.4) U1(-5.8,-0.8) U2(-5.4,-0.8) U3(-5,-0.8) U5(-4.2,-0.8) U6(-3.8,-0.8) U9(-2.6,-0.8) U11(-1.8,-0.8) U13(-1,-0.8) U14(-0.6,-0.8) U16(0.2,-0.8) U17(0.6,-0.8) U19(1.4,-0.8) U21(2.2,-0.8) U22(2.6,-0.8) U23(3,-0.8) U24(3.4,-0.8) U28(5,-0.8) U29(5.4,-0.8) V2(-5.4,-1.2) V8(-3,-1.2) V10(-2.2,-1.2) V11(-1.8,-1.2) V12(-1.4,-1.2) V13(-1,-1.2) V14(-0.6,-1.2) V15(-0.2,-1.2) V16(0.2,-1.2) V18(1,-1.2) V19(1.4,-1.2) V20(1.8,-1.2) V22(2.6,-1.2) V24(3.4,-1.2) V25(3.8,-1.2) V27(4.6,-1.2) V28(5,-1.2) V29(5.4,-1.2) V30(5.8,-1.2) W1(-5.8,-1.6) W2(-5.4,-1.6) W3(-5,-1.6) W4(-4.6,-1.6) W5(-4.2,-1.6) W6(-3.8,-1.6) W9(-2.6,-1.6) W11(-1.8,-1.6) W12(-1.4,-1.6) W13(-1,-1.6) W15(-0.2,-1.6) W16(0.2,-1.6) W17(0.6,-1.6) W18(1,-1.6) W22(2.6,-1.6) W24(3.4,-1.6) W25(3.8,-1.6) W26(4.2,-1.6) W28(5,-1.6) W30(5.8,-1.6) Y1(-5.8,-2) Y2(-5.4,-2) Y3(-5,-2) Y4(-4.6,-2) Y5(-4.2,-2) Y6(-3.8,-2) Y8(-3,-2) Y9(-2.6,-2) Y10(-2.2,-2) Y12(-1.4,-2) Y13(-1,-2) Y14(-0.6,-2) Y15(-0.2,-2) Y16(0.2,-2) Y18(1,-2) Y20(1.8,-2) Y21(2.2,-2) Y22(2.6,-2) Y23(3,-2) Y24(3.4,-2) Y26(4.2,-2) Y27(4.6,-2) Y28(5,-2) Y29(5.4,-2) Y30(5.8,-2)
  silkscreen extent -6.36,-6.06 6.26,6.16, body extent -6.1,-5.9 6.1,5.9, height 0.9
CAPC0603X33X15LL03T05 [mm] "Chip Capacitor, 2-Leads, Body 0.63x0.33mm, IPC High Density"
  rect 0.4x0.32 smd: 1(-0.26,0) 2(0.26,0)
  body extent -0.32,-0.17 0.32,0.17, height 0.33
CAPC3216X190X55ML30T25 [mm] "Chip Capacitor, 2-Leads, Body 3.5x1.9mm, IPC Low Density"
  rect 1.65x2 smd: 1(-1.475,0) 2(1.475,0)
  silkscreen extent -0.25,-0.9 0.25,0.9, body extent -1.75,-0.95 1.75,0.95, height 1.9
DC00220A10 [mm]
  rect 2.55x2.55 hole 1.7: 1(0,0)
  round 2.55 hole 1.7: 2(-5,0) 3(-2.5,-2.7)
  silkscreen extent -11.2,-2.5 2.1,2.5, body extent -11.03,-3.05 0.37,2.3, height 8.1
FT232RL [mm]
  rect 0.4x1.5 smd: 1(-4.396,-3.514) 2(-3.746,-3.514) 3(-3.096,-3.514) 4(-2.446,-3.514) 5(-1.796,-3.514) 6(-1.146,-3.514) 7(-0.496,-3.514) 8(0.154,-3.514) 9(0.804,-3.514) 10(1.454,-3.514) 11(2.104,-3.514) 12(2.754,-3.514) 13(3.404,-3.514) 14(4.054,-3.514) 15(4.054,3.736) 16(3.404,3.736) 17(2.754,3.736) 18(2.104,3.736) 19(1.454,3.736) 20(0.804,3.736) 21(0.154,3.736) 22(-0.496,3.736) 23(-1.146,3.736) 24(-1.796,3.736) 25(-2.446,3.736) 26(-3.096,3.736) 27(-3.746,3.736) 28(-4.396,3.736)
  silkscreen extent -5.63,-3.44 4.93,2.71, body extent -5.27,-3.79 4.93,4.01, height 2
HRO_PJ-320D-A [mm]
  rect 1.2x2.5 smd: 1(6.338,-3.202) 2(5.238,3.298) 3(1.238,3.298) 4(-1.762,3.298)
  round 1 hole 1 unplated: ""(-3.362,0.048) ""(3.638,0.048)
  silkscreen extent -6.96,-5.55 7.14,3.1, body extent -6.96,-3.95 7.14,4.05, height 5.3
K4F8E304HB-MGCJ [mm]
  round 0.38 smd: A1(-4.4,6.825) A2(-3.6,6.825) A3(-2.8,6.825) A4(-2,6.825) A5(-1.2,6.825) A8(1.2,6.825) A9(2,6.825) A10(2.8,6.825) A11(3.6,6.825) A12(4.4,6.825) AA1(-4.4,-6.175) AA2(-3.6,-6.175) AA3(-2.8,-6.175) AA4(-2,-6.175) AA5(-1.2,-6.175) AA8(1.2,-6.175) AA9(2,-6.175) AA10(2.8,-6.175) AA11(3.6,-6.175) AA12(4.4,-6.175) AB1(-4.4,-6.825) AB2(-3.6,-6.825) AB3(-2.8,-6.825) AB4(-2,-6.825) AB5(-1.2,-6.825) AB8(1.2,-6.825) AB9(2,-6.825) AB10(2.8,-6.825) AB11(3.6,-6.825) AB12(4.4,-6.825) B1(-4.4,6.175) B2(-3.6,6.175) B3(-2.8,6.175) B4(-2,6.175) B5(-1.2,6.175) B8(1.2,6.175) B9(2,6.175) B10(2.8,6.175) B11(3.6,6.175) B12(4.4,6.175) C1(-4.4,5.525) C2(-3.6,5.525) C3(-2.8,5.525) C4(-2,5.525) C5(-1.2,5.525) C8(1.2,5.525) C9(2,5.525) C10(2.8,5.525) C11(3.6,5.525) C12(4.4,5.525) D1(-4.4,4.875) D2(-3.6,4.875) D3(-2.8,4.875) D4(-2,4.875) D5(-1.2,4.875) D8(1.2,4.875) D9(2,4.875) D10(2.8,4.875) D11(3.6,4.875) D12(4.4,4.875) E1(-4.4,4.225) E2(-3.6,4.225) E3(-2.8,4.225) E4(-2,4.225) E5(-1.2,4.225) E8(1.2,4.225) E9(2,4.225) E10(2.8,4.225) E11(3.6,4.225) E12(4.4,4.225) F1(-4.4,3.575) F2(-3.6,3.575) F3(-2.8,3.575) F4(-2,3.575) F5(-1.2,3.575) F8(1.2,3.575) F9(2,3.575) F10(2.8,3.575) F11(3.6,3.575) F12(4.4,3.575) G1(-4.4,2.925) G2(-3.6,2.925) G3(-2.8,2.925) G4(-2,2.925) G5(-1.2,2.925) G8(1.2,2.925) G9(2,2.925) G10(2.8,2.925) G11(3.6,2.925) G12(4.4,2.925) H1(-4.4,2.275) H2(-3.6,2.275) H3(-2.8,2.275) H4(-2,2.275) H5(-1.2,2.275) H8(1.2,2.275) H9(2,2.275) H10(2.8,2.275) H11(3.6,2.275) H12(4.4,2.275) J1(-4.4,1.625) J2(-3.6,1.625) J3(-2.8,1.625) J4(-2,1.625) J5(-1.2,1.625) J8(1.2,1.625) J9(2,1.625) J10(2.8,1.625) J11(3.6,1.625) J12(4.4,1.625) K1(-4.4,0.975) K2(-3.6,0.975) K3(-2.8,0.975) K4(-2,0.975) K5(-1.2,0.975) K8(1.2,0.975) K9(2,0.975) K10(2.8,0.975) K11(3.6,0.975) K12(4.4,0.975) N1(-4.4,-0.975) N2(-3.6,-0.975) N3(-2.8,-0.975) N4(-2,-0.975) N5(-1.2,-0.975) N8(1.2,-0.975) N9(2,-0.975) N10(2.8,-0.975) N11(3.6,-0.975) N12(4.4,-0.975) P1(-4.4,-1.625) P2(-3.6,-1.625) P3(-2.8,-1.625) P4(-2,-1.625) P5(-1.2,-1.625) P8(1.2,-1.625) P9(2,-1.625) P10(2.8,-1.625) P11(3.6,-1.625) P12(4.4,-1.625) R1(-4.4,-2.275) R2(-3.6,-2.275) R3(-2.8,-2.275) R4(-2,-2.275) R5(-1.2,-2.275) R8(1.2,-2.275) R9(2,-2.275) R10(2.8,-2.275) R11(3.6,-2.275) R12(4.4,-2.275) T1(-4.4,-2.925) T2(-3.6,-2.925) T3(-2.8,-2.925) T4(-2,-2.925) T5(-1.2,-2.925) T8(1.2,-2.925) T9(2,-2.925) T10(2.8,-2.925) T11(3.6,-2.925) T12(4.4,-2.925) U1(-4.4,-3.575) U2(-3.6,-3.575) U3(-2.8,-3.575) U4(-2,-3.575) U5(-1.2,-3.575) U8(1.2,-3.575) U9(2,-3.575) U10(2.8,-3.575) U11(3.6,-3.575) U12(4.4,-3.575) V1(-4.4,-4.225) V2(-3.6,-4.225) V3(-2.8,-4.225) V4(-2,-4.225) V5(-1.2,-4.225) V8(1.2,-4.225) V9(2,-4.225) V10(2.8,-4.225) V11(3.6,-4.225) V12(4.4,-4.225) W1(-4.4,-4.875) W2(-3.6,-4.875) W3(-2.8,-4.875) W4(-2,-4.875) W5(-1.2,-4.875) W8(1.2,-4.875) W9(2,-4.875) W10(2.8,-4.875) W11(3.6,-4.875) W12(4.4,-4.875) Y1(-4.4,-5.525) Y2(-3.6,-5.525) Y3(-2.8,-5.525) Y4(-2,-5.525) Y5(-1.2,-5.525) Y8(1.2,-5.525) Y9(2,-5.525) Y10(2.8,-5.525) Y11(3.6,-5.525) Y12(4.4,-5.525)
  silkscreen extent -5.65,-7.33 5,7.33, body extent -5,-7.25 5,7.25, height 1.1
MT6631 [mm]
  rect 0.5x0.25 smd paste+0 mask+0.051: 1(-2.4,1.8) 2(-2.4,1.4) 3(-2.4,1) 4(-2.4,0.6) 5(-2.4,0.2) 6(-2.4,-0.2) 7(-2.4,-0.6) 8(-2.4,-1) 9(-2.4,-1.4) 10(-2.4,-1.8) 21(2.4,-1.8) 22(2.4,-1.4) 23(2.4,-1) 24(2.4,-0.6) 25(2.4,-0.2) 26(2.4,0.2) 27(2.4,0.6) 28(2.4,1) 29(2.4,1.4) 30(2.4,1.8)
  rect 0.25x0.5 smd paste+0 mask+0.051: 11(-1.8,-2.4) 12(-1.4,-2.4) 13(-1,-2.4) 14(-0.6,-2.4) 15(-0.2,-2.4) 16(0.2,-2.4) 17(0.6,-2.4) 18(1,-2.4) 19(1.4,-2.4) 20(1.8,-2.4) 31(1.8,2.4) 32(1.4,2.4) 33(1,2.4) 34(0.6,2.4) 35(0.2,2.4) 36(-0.2,2.4) 37(-0.6,2.4) 38(-1,2.4) 39(-1.4,2.4) 40(-1.8,2.4)
  rect 3.5x3.5 smd paste+0 mask+0.051: 41(0,0)
  silkscreen extent -3,-2.5 2.5,2.5, body extent -2.67,-2.67 2.67,2.67, height 0.25
OSCCC320X250X90N [mm]
  rect 1.11x1.21 smd: 1(-0.855,1.237) 2(-0.855,-1.063) 3(0.845,-1.063) 4(0.845,1.237)
  silkscreen extent -2.2,-0.14 1.25,1.29, body extent -1.25,-1.51 1.25,1.69, height 0.6
RJ458Z4 [mm]
  round 1.493 hole 0.96: 1(0,0) 2(2.54,-1.27) 3(0,-2.54) 4(2.54,-3.81) 5(0,-5.08) 6(2.54,-6.35) 7(0,-7.62) 8(2.54,-8.89)
  round 3.015 hole 2.01: MH1(-9.4,3.68) MH2(-9.4,-12.57)
  round 1.665 hole 3.33 unplated: MH3(-6.35,1.27) MH4(-6.35,-10.16)
  silkscreen extent -14.25,-12.44 6.1,3.55, body extent -14.11,-13.29 4.69,4.57, height 13.28
RTL8201F [mm]
  rect 0.85x0.3 smd: 1(-2.45,1.75) 2(-2.45,1.25) 3(-2.45,0.75) 4(-2.45,0.25) 5(-2.45,-0.25) 6(-2.45,-0.75) 7(-2.45,-1.25) 8(-2.45,-1.75) 17(2.45,-1.75) 18(2.45,-1.25) 19(2.45,-0.75) 20(2.45,-0.25) 21(2.45,0.25) 22(2.45,0.75) 23(2.45,1.25) 24(2.45,1.75)
  rect 0.3x0.85 smd: 9(-1.75,-2.45) 10(-1.25,-2.45) 11(-0.75,-2.45) 12(-0.25,-2.45) 13(0.25,-2.45) 14(0.75,-2.45) 15(1.25,-2.45) 16(1.75,-2.45) 25(1.75,2.45) 26(1.25,2.45) 27(0.75,2.45) 28(0.25,2.45) 29(-0.25,2.45) 30(-0.75,2.45) 31(-1.25,2.45) 32(-1.75,2.45)
  rect 3.6x3.6 smd: 33(0,0)
  silkscreen extent -3,2.38 -2.75,2.62, body extent -2.55,-2.55 2.55,2.55, height 1
SAMTEC_ZF1-15-01-X-WT-XX [mm]
  rect 0.6x1.8 smd: 01(-6.579,3.195) 02(-5.579,3.195) 03(-4.579,3.195) 04(-3.579,3.195) 05(-2.579,3.195) 06(-1.579,3.195) 07(-0.579,3.195) 08(0.421,3.195) 09(1.421,3.195) 10(2.421,3.195) 11(3.421,3.195) 12(4.421,3.195) 13(5.421,3.195) 14(6.421,3.195) 15(7.421,3.195)
  rect 2.2x2.5 smd: S1(-9.179,0.655) S2(10.021,0.655)
  silkscreen extent -10.63,-3.49 11.47,3.28, body extent -10.58,-3.54 11.43,3.37, height 3.03
SOP65P640X120-14N [mm]
  rect 1.475x0.45 smd: 1(-2.938,1.95) 2(-2.938,1.3) 3(-2.938,0.65) 4(-2.938,0) 5(-2.938,-0.65) 6(-2.938,-1.3) 7(-2.938,-1.95) 8(2.938,-1.95) 9(2.938,-1.3) 10(2.938,-0.65) 11(2.938,0) 12(2.938,0.65) 13(2.938,1.3) 14(2.938,1.95)
  silkscreen extent -3.67,-2.5 1.85,2.52, body extent -3.21,-2.5 3.21,2.5, height 1
TE_2-826656-0 [mm]
  rect 1.508x1.508 hole 1: 1(-22.36,1.331)
  round 1.508 hole 1: 2(-19.82,1.331) 3(-17.28,1.331) 4(-14.74,1.331) 5(-12.2,1.331) 6(-9.66,1.331) 7(-7.12,1.331) 8(-4.58,1.331) 9(-2.04,1.331) 10(0.5,1.331) 11(3.04,1.331) 12(5.58,1.331) 13(8.12,1.331) 14(10.66,1.331) 15(13.2,1.331) 16(15.74,1.331) 17(18.28,1.331) 18(20.82,1.331) 19(23.36,1.331) 20(25.9,1.331) 21(-22.36,-1.209) 22(-19.82,-1.209) 23(-17.28,-1.209) 24(-14.74,-1.209) 25(-12.2,-1.209) 26(-9.66,-1.209) 27(-7.12,-1.209) 28(-4.58,-1.209) 29(-2.04,-1.209) 30(0.5,-1.209) 31(3.04,-1.209) 32(5.58,-1.209) 33(8.12,-1.209) 34(10.66,-1.209) 35(13.2,-1.209) 36(15.74,-1.209) 37(18.28,-1.209) 38(20.82,-1.209) 39(23.36,-1.209) 40(25.9,-1.209)
  silkscreen extent -23.63,-2.44 27.17,3.26, body extent -23.63,-2.43 27.17,2.57, height 8.59
TE_1932788-1 [mm]
  rect 0.45x1.38 smd: 1(1.264,1.361) 2(0.614,1.361) 3(-0.036,1.361) 4(-0.686,1.361) 5(-1.336,1.361)
  rect 1.4x2.1 smd: SH1(-2.536,1.001) SH2(2.464,1.001)
  oval 1.4x2.1 hole 0.6 slot 1.3 at 90 deg: SH3(-3.986,-1.299) SH6(3.914,-1.299)
  rect 1.375x1.9 smd: SH4(-0.973,-1.299) SH5(0.902,-1.299)
  Keep-Out Layer board cut-out: 1.389,-2.749 1.389,-2.749 1.889,-2.249 1.889,-1.149 1.89,-1.125 1.891,-1.102 1.895,-1.079 1.899,-1.055 1.904,-1.033 1.911,-1.01 1.919,-0.988 1.928,-0.966 1.938,-0.945 1.949,-0.924 1.962,-0.904 1.975,-0.884 1.989,-0.866 2.005,-0.848 2.021,-0.831 2.038,-0.815 2.056,-0.799 2.074,-0.785 2.094,-0.772 2.114,-0.759 2.135,-0.748 2.156,-0.738 2.178,-0.729 2.2,-0.721 2.223,-0.714 2.245,-0.709 2.269,-0.705 2.292,-0.701 2.315,-0.7 2.339,-0.699 2.359,-0.699 2.383,-0.699 2.407,-0.701 2.43,-0.705 2.454,-0.709 2.477,-0.715 2.5,-0.723 2.522,-0.731 2.544,-0.741 2.565,-0.751 2.585,-0.764 2.605,-0.777 2.625,-0.791 2.643,-0.806 2.66,-0.822 2.677,-0.84 2.692,-0.858 2.707,-0.876 2.72,-0.896 2.733,-0.917 2.744,-0.938 2.754,-0.959 2.763,-0.981 2.771,-1.004 2.777,-1.027 2.782,-1.05 2.786,-1.074 2.788,-1.098 2.789,-1.121 2.789,-1.149 2.789,-2.249 3.289,-2.749
  Keep-Out Layer board cut-out: -3.361,-2.749 -3.361,-2.749 -2.861,-2.249 -2.861,-1.149 -2.861,-1.121 -2.86,-1.098 -2.858,-1.074 -2.854,-1.05 -2.849,-1.027 -2.843,-1.004 -2.835,-0.981 -2.826,-0.959 -2.816,-0.938 -2.805,-0.917 -2.792,-0.896 -2.779,-0.876 -2.764,-0.858 -2.749,-0.84 -2.732,-0.822 -2.715,-0.806 -2.697,-0.791 -2.677,-0.777 -2.657,-0.764 -2.637,-0.751 -2.616,-0.741 -2.594,-0.731 -2.572,-0.723 -2.549,-0.715 -2.526,-0.709 -2.502,-0.705 -2.479,-0.701 -2.455,-0.699 -2.431,-0.699 -2.411,-0.699 -2.387,-0.7 -2.364,-0.701 -2.341,-0.705 -2.317,-0.709 -2.295,-0.714 -2.272,-0.721 -2.25,-0.729 -2.228,-0.738 -2.207,-0.748 -2.186,-0.759 -2.166,-0.772 -2.146,-0.785 -2.128,-0.799 -2.11,-0.815 -2.093,-0.831 -2.077,-0.848 -2.061,-0.866 -2.047,-0.884 -2.034,-0.904 -2.021,-0.924 -2.01,-0.945 -2,-0.966 -1.991,-0.988 -1.983,-1.01 -1.976,-1.033 -1.971,-1.055 -1.967,-1.079 -1.963,-1.102 -1.962,-1.125 -1.961,-1.149 -1.961,-2.249 -1.461,-2.749
  silkscreen extent -3.8,0.07 3.72,2.76, body extent -4.14,-3.45 4.06,1.7, height 2.48
TE_6364372-2 [mm]
  rect 1.428x1.428 / inner round 1.428 / far side rect 1.428x1.428 hole 0.92: 1(-3.271,5.926)
  round 1.428 hole 0.92: 2(-0.771,5.926) 3(1.229,5.926) 4(3.729,5.926)
  round 3.316 hole 2.3: SH1(-6.341,3.216) SH2(6.799,3.216)
  silkscreen extent -6.97,-7.06 6.79,6.94, body extent -7.14,-6.96 7.49,7.04, height 7.69
WP7BP040VA1R8000 [mm]
  rect 0.22x0.55 smd: 1(-3.8,-0.925) 2(-3.8,0.925) 3(-3.4,-0.925) 4(-3.4,0.925) 5(-3,-0.925) 6(-3,0.925) 7(-2.6,-0.925) 8(-2.6,0.925) 9(-2.2,-0.925) 10(-2.2,0.925) 11(-1.8,-0.925) 12(-1.8,0.925) 13(-1.4,-0.925) 14(-1.4,0.925) 15(-1,-0.925) 16(-1,0.925) 17(-0.6,-0.925) 18(-0.6,0.925) 19(-0.2,-0.925) 20(-0.2,0.925) 21(0.2,-0.925) 22(0.2,0.925) 23(0.6,-0.925) 24(0.6,0.925) 25(1,-0.925) 26(1,0.925) 27(1.4,-0.925) 28(1.4,0.925) 29(1.8,-0.925) 30(1.8,0.925) 31(2.2,-0.925) 32(2.2,0.925) 33(2.6,-0.925) 34(2.6,0.925) 35(3,-0.925) 36(3,0.925) 37(3.4,-0.925) 38(3.4,0.925) 39(3.8,-0.925) 40(3.8,0.925) 41(-4.2,-0.925) 42(-4.2,0.925) 43(4.2,-0.925) 44(4.2,0.925)
  silkscreen extent -4.7,-1.7 4.7,0.68, body extent -4.7,-1 4.7,1, height 0.52

## Part data
C1 C2 C3 C4 C5 C6 C7 C8 C9 C10 C11 C12 C13 C14 C15 C16 C27 C28 C29 C30 C31 C32 C33 C34 C35 C36 C37 C38 C39 C40 C41 C42: library part CMP-1662-00011-2, "Chip Capacitor, 100 uF, +/- 20%, 6.3 V, -55 to 85 degC, 1206 (3216 Metric), RoHS, Tape and Reel", Capacitance="100 uF", Case Code (Imperial)=1206, Case Code (Metric)=3216, Max Operating Temperature="85 degC", Min Operating Temperature="-55 degC", Package Quantity=2000, Tolerance=20%, Type (Capacitors)=X5R, Voltage Rating="6.3 V", Case\/Package=1206, ComponentLink1Description="Manufacturer URL", ComponentLink1URL=http://www.murata.com/, ComponentLink2Description=Datasheet, ComponentLink2URL=http://psearch.en.murata.com/capacitor/product/GRM31CR60J107ME39%23.pdf, DatasheetVersion=09/2016, Height="1.6 mm", Length="3.2 mm", Mount="Surface Mount", Mounting Technology="Surface Mount", PackageDescription="2-Pin Surface Mount Device, Body 3.2 x 1.6 mm", PackageReference=1206, Packaging="Tape and Reel", PartNumber=GRM31CR60J107ME39L, Pins=2, Radiation Hardening=No, REACH SVHC="No SVHC", RoHSCompliant=true, Voltage Rating (DC)="6.3 V", Width="1.6 mm"
C17 C18 C19 C20 C21 C22 C23 C24 C25 C26 C43 C44 C45 C46 C47 C48 C49: library part CMP-2010-01652-4, "Chip Capacitor, 100 nF, +/- 10%, 6.3 V, -55 to 85 degC, 0201 (0603 Metric), RoHS, Tape and Reel", Capacitance="100 nF", Case Code (Imperial)=0201, Case Code (Metric)=0603, Manufacturer="Basic Passives", Max Operating Temperature="85 degC", Min Operating Temperature="-55 degC", Package Quantity=15000, Tolerance=10%, Type (Capacitors)=X5R, Voltage Rating="6.3 V", Voltage Rating (DC)="3 V", Case\/Package=0201, ComponentLink1Description="Manufacturer URL", ComponentLink1URL=http://www.murata.com/, ComponentLink2Description=Datasheet, ComponentLink2URL=http://search.murata.co.jp/Ceramy/image/img/A01X/G101/ENG/GRM033R60J104KE19-01.pdf, DatasheetVersion=03/2016, Height="0.3 mm", Length="0.6 mm", Mount="Surface Mount", Mounting Technology="Surface Mount", PackageDescription="2-Pin Surface Mount Device, Body 0.6 x 0.3 mm", PackageReference=0201, Packaging="Tape and Reel", PartNumber=GRM033R60J104KE19D, Pins=2, Radiation Hardening=No, REACH SVHC="No SVHC", RoHSCompliant=true, Width="0.3 mm"
IC3: "Integrated Circuit", Manufacturer_Name=SAMSUNG, Datasheet Link=https://datasheet.lcsc.com/lcsc/2007011825_Samsung-KLMAG1JETD-B041_C499919.pdf, Height=0.8mm, Manufacturer_Part_Number=KLMAG1JETD-B041
IC7: "Integrated Circuit", Manufacturer_Name="Texas Instruments", Mouser Part Number=595-TXB0104PWR, Arrow Part Number=TXB0104PWR, Arrow Price/Stock=https://www.arrow.com/en/products/txb0104pwr/texas-instruments?region=nac, Datasheet Link=http://www.ti.com/lit/ds/symlink/txb0104.pdf, Height=1.2mm, Manufacturer_Part_Number=TXB0104PWR, Mouser Price/Stock=https://www.mouser.co.uk/ProductDetail/Texas-Instruments/TXB0104PWR?qs=oFXvjAmG9EjSF69GpMWq5w%3D%3D
J8: "Connector", Manufacturer_Name=JAE, Mouser Part Number=656-WP7B-P040VA1-R8K, Datasheet Link=https://www.jae.com/en/connectors/series/detail/product/id=66869, Height=0.65mm, Manufacturer_Part_Number=WP7B-P040VA1-R8000, Mouser Price/Stock=https://www.mouser.co.uk/ProductDetail/JAE-Electronics/WP7B-P040VA1-R8000?qs=chTDxNqvsymfkoVlvYUryA%3D%3D
J9: "Connector", Manufacturer_Name="XKB Connectivity", Datasheet Link=http://www.helloxkb.com/public/images/pdf/DC-002-2.0A-1.0.pdf, Height=7.6mm, Manufacturer_Part_Number=DC-002-2.0A-1.0
J11: "Connector", Manufacturer_Name="TE Connectivity", Mouser Part Number=592-RJ45-8Z4, Datasheet Link=https://media.digikey.com/pdf/Data%20Sheets/Tyco%20Electronics%20Corcom%20PDFs/Z_Series.pdf, Height=13.08mm, Manufacturer_Part_Number=RJ45-8Z4, Mouser Price/Stock=https://www.mouser.co.uk/ProductDetail/TE-Connectivity-Corcom/RJ45-8Z4?qs=7kimBNJHayDCs5Ci3ERF6w%3D%3D
U1: "Integrated Circuit", Manufacturer_Name=Mediatek, Manufacturer_Part_Number=MT8365V/BZB, Mouser Part Number=840-MT8365V/BZB, Datasheet Link=https://www.mouser.co.uk/datasheet/2/1074/MT8365_AIoT_Application_Processor_Datasheet_v1_0_2-3106631.pdf, Height=0.9mm, Mouser Price/Stock=https://www.mouser.co.uk/ProductDetail/MediaTek/MT8365V-BZB?qs=Jm2GQyTW%2FbjcedX9ugwNWQ%3D%3D
U2: Clock Frequency (fc)=2133MHz, JLCPCB Part Class="Extended Part", LCSC Part Name="K4UBE3D4AA-MGCL 停产", Manufacturer=SAMSUNG(三星半导体), Operating Temperature=-25℃~+85℃, Refresh Current=-, Supply Voltage=1.7V~1.95V, Add into BOM=yes, Convert to PCB=yes, Datasheet=https://atta.szlcsc.com/upload/public/pdf/source/20231024/5530CB18C2033A14DEC9B3A35E728586.pdf, Device=K4UBE3D4AA-MGCL, Manufacturer Part=K4UBE3D4AA-MGCL, Memory Format="SDRAM LPDDR4X", Memory Size=32Gbit, Supplier=LCSC, Supplier Footprint=FBGA-200, Supplier Part=C2920257, Supply current=-, Symbol=K4UBE3D4AA-MGCL
U4: "Integrated Circuit", Manufacturer_Name=Mediatek, Manufacturer_Part_Number=MT6358W/A, Mouser Part Number=840-MT6358W/A, Datasheet Link=https://www.mouser.com/catalog/specsheets/MediaTek_MTK_MT6358_Product_Brief_v1_0.pdf?_gl=1*14yevt7*_ga*OTAyMjU2NDU3LjE2ODExMDUyMzk.*_ga_1KQLCYKRX3*MTcwODA1NjU3MS4xMTcuMC4xNzA4MDU2NTczLjAuMC4w*_ga_15W4STQT4T*MTcwODA1NjU3Mi4xNzIuMC4xNzA4MDU2NTczLjU5LjAuMA.., Height=0.66mm, Mouser Price/Stock=https://www.mouser.co.uk/ProductDetail/MediaTek/MT6358W-A?qs=Jm2GQyTW%2FbiK3FZkyfX0lQ%3D%3D
U7: "Integrated Circuit", Manufacturer_Name=Realtek, Datasheet Link=https://pdf1.alldatasheet.com/datasheet-pdf/view/1132250/REALTEK/RTL8201F-VB-CG.html, Height=1mm, Manufacturer_Part_Number=RTL8201F-VB-CG
Y1: library part NX3225GA-26MHZ-TI

## Nets (pads, with @x,y where several pads share a name; then routed paths per layer and width w, separated by ;. In a path a pad name is that pad's centre, name@x,y a point inside that pad or via, vN(x,y) a via of type N, cw(c..) or ccw(c..) an arc to the next point about the centre after c; other vN are vias at no path point)
26M_CLKSQ: U1.AC20
+5: J5.1
AAVDD18_GPS: U4.F6 U6.26 U6.27 U6.40
AAVDD28_FM: U4.R6 U6.36
AVDD33: C47.2 C48.2 C49.2 U4.N12 U6.33 U7.7 U7.14 U7.30
BT_CLK: U1.AD8 U6.24
BT_DATA: U1.AC8 U6.25
BT_IN: U1.AH9 U6.15
BT_IP: U1.AJ9 U6.16
BT_QN: U1.AH11 U6.13
BT_QP: U1.AH10 U6.14
CK_c_a: U1.D8 U2.J9
CK_c_b: U1.K18 U2.P9
CK_t_a: U1.E8 U2.J8
CK_t_b: U1.J18 U2.P8
CKE0_a: U1.K14 U2.J4
CKE0_b: U1.D24 U2.P4
CKE1_a: U1.J14 U2.J5
CKE1_b: U1.C24 U2.P5
CLK: IC3.M6 U1.M28
CMD: IC3.M5 U1.M26
CRS/CRS_DV: U1.AG21 U7.26
CS0_a: U1.G9 U2.H4
CS0_b: U1.F18 U2.R4
CS1_a: U1.F9 U2.H3
CS1_b: U1.G18 U2.R3
DMI0_a: U1.C10 U2.C3
DMI0_b: U1.A24 U2.Y3
DMI1_a: U1.B1 U2.C10
DMI1_b: U1.E29 U2.Y10
DQS0_c_a: U1.C7 U2.E3
DQS0_c_b: U1.B23 U2.V3
DQS0_t_a: U1.C6 U2.D3
DQS0_t_b: U1.B22 U2.W3
DQS1_c_a: U1.C2 U2.E10
DQS1_c_b: U1.B29 U2.V10
DQS1_t_a: U1.D2 U2.D10
DQS1_t_b: U1.B28 U2.W10
DSL: U1.N26
EMI0_A0: U1.A14 U1.B15 U1.B16 U1.C3 U1.C14 U1.C17 U1.C18 U1.C20 U1.C28 U1.D3 U1.D14 U1.D18 U1.D20 U1.D28 U1.E6 U1.E12 U1.E18 U1.E20 U1.E24 U1.F3 U1.F6 U1.F24 U1.G3 U1.G6 U1.G14 U1.H3 U1.H9 U1.H14 U1.H28 U1.J9 U1.J24 U1.K6
EMI0_A3: U1.J6 U2.H11
EMI0_A4: U1.J12 U2.H10
EMI0_A12: U1.H12 U2.H9
EMI0_ACT_N: U1.F12 U2.J2
EMI0_BA0: U1.K12 U2.J11
EMI0_DQ0: U1.C11 U2.E2
EMI0_DQ1: U1.A2 U2.B11
EMI0_DQ2: U1.B12 U2.E4
EMI0_DQ3: U1.B4 U2.E11
EMI0_DQ4: U1.B11 U2.F2
EMI0_DQ5: U1.B3 U2.C11
EMI0_DQ6: U1.B13 U2.F4
EMI0_DQ7: U1.B5 U2.F11
EMI0_DQ8: U1.B7 U2.B4
EMI0_DQ9: U1.E1 U2.F9
EMI0_DQ10: U1.B8 U2.C4
EMI0_DQ11: U1.F2 U2.E9
EMI0_DQ12: U1.B9 U2.B2
EMI0_DQ13: U1.G2 U2.C9
EMI0_DQ14: U1.C9 U2.C2
EMI0_DQ15: U1.H2 U2.B9
EMI0_ODT: U1.G12 U2.H2
EMI1_A0: U1.J28 U2.R11
EMI1_A1: U1.H20 U2.R10
EMI1_A3: U1.G20 U2.R9
EMI1_A5: U1.J20 U2.P11
EMI1_ACT_N: U1.H24 U2.R2
EMI1_DQ0: U1.E30 U2.U9
EMI1_DQ1: U1.B24 U2.Y2
EMI1_DQ2: U1.G29 U2.Y9
EMI1_DQ3: U1.A26 U2.Y4
EMI1_DQ4: U1.F29 U2.V9
EMI1_DQ5: U1.B25 U2.AA2
EMI1_DQ6: U1.H29 U2.AA9
EMI1_DQ7: U1.A27 U2.AA4
EMI1_DQ8: U1.A29 U2.U11
EMI1_DQ9: U1.A21 U2.V2
EMI1_DQ10: U1.B30 U2.V11
EMI1_DQ11: U1.B20 U2.U2
EMI1_DQ12: U1.C30 U2.Y11
EMI1_DQ13: U1.B19 U2.V4
EMI1_DQ14: U1.D29 U2.AA11
EMI1_DQ15: U1.B18 U2.U4
EMI1_ODT: U1.G24 U2.P2
EMI_EXTR: U1.J1
EMI_TN: U1.G28
EXT_COL: U1.AE16
EXT_MDC: U1.AG17 U7.22
EXT_MDIO: U1.AF17 U7.23
EXT_RXC: U1.AF18 U7.15
EXT_RXD0: U1.AJ19 U7.9
EXT_RXD1: U1.AG18 U7.10
EXT_RXD2: U1.AJ18
EXT_RXD3: U1.AH18
EXT_RXER: U1.AH19 U7.28
EXT_TXC: U1.AF19
EXT_TXD0: U1.AE20 U7.16
EXT_TXD1: U1.AE21 U7.17
EXT_TXD2: U1.AF21
EXT_TXD3: U1.AG22
EXT_TXEN: U1.AE17 U7.20
GND: C1.1 C2.1 C3.1 C4.1 C5.1 C6.1 C7.1 C8.1 C9.1 C10.1 C11.1 C12.1 C13.1 C14.1 C15.1 C16.1 C17.1 C18.1 C19.1 C20.1 C21.1 C22.1 C23.1 C24.1 C25.1 C26.1 C27.1 C28.1 C29.1 C30.1 C31.1 C32.1 C33.1 C34.1 C35.1 C36.1 C37.1 C38.1 C39.1 C40.1 C41.1 C42.1 C43.1 C44.1 C45.1 C46.1 C47.1 C48.1 C49.1 IC3.A6 IC3.C4 IC3.E7 IC3.G5 IC3.H10 IC3.J5 IC3.K8 IC3.N2 IC3.N5 IC3.P4 IC3.P6 J1.5 J1.SH1 J1.SH2 J1.SH3 J1.SH4 J1.SH5 J1.SH6 J2.5 J2.SH1 J2.SH2 J2.SH3 J2.SH4 J2.SH5 J2.SH6 J3.5 J3.SH1 J3.SH2 J3.SH3 J3.SH4 J3.SH5 J3.SH6 J5.4 J5.SH1 J5.SH2 J9.2 J9.3 U1.A1 U1.A3 U1.A5 U1.A7 U1.A9 U1.A11 U1.A13 U1.A16 U1.A18 U1.A20 U1.A23 U1.A30 U1.AA7 U1.AA9 U1.AA10 U1.AA11 U1.AA13 U1.AA14 U1.AA15 U1.AA16 U1.AA17 U1.AA28 U1.AB3 U1.AB6 U1.AB10 U1.AB11 U1.AB12 U1.AB15 U1.AB16 U1.AB17 U1.AB25 U1.AC7 U1.AC11 U1.AC12 U1.AC15 U1.AC16 U1.AC17 U1.AC21 U1.AC25 U1.AC26 U1.AD2 U1.AD6 U1.AD11 U1.AD12 U1.AD16 U1.AD17 U1.AD20 U1.AD22 U1.AD25 U1.AD26 U1.AE7 U1.AE10 U1.AE11 U1.AE12 U1.AE18 U1.AE26 U1.AE27 U1.AF10 U1.AF11 U1.AG6 U1.AG7 U1.AG8 U1.AG9 U1.AG10 U1.AG11 U1.AG12 U1.AH13 U1.B2 U1.B21 U1.B26 U1.B27 U1.C4 U1.C5 U1.C8 U1.C13 U1.C15 U1.C16 U1.C19 U1.C21 U1.C22 U1.C23 U1.C26 U1.C27 U1.C29 U1.D1 U1.D4 U1.D5 U1.D7 U1.D10 U1.D11 U1.D12 U1.D13 U1.D15 U1.D16 U1.D17 U1.D19 U1.D21 U1.D22 U1.D23 U1.E2 U1.E4 U1.E5 U1.E7 U1.E9 U1.E11 U1.E13 U1.E14 U1.E15 U1.E16 U1.E17 U1.E19 U1.E27 U1.E28 U1.F1 U1.F4 U1.F5 U1.F10 U1.F11 U1.F13 U1.F15 U1.F16 U1.F17 U1.F19 U1.F20 U1.F22 U1.F25 U1.F30 U1.G4 U1.G5 U1.G7 U1.G13 U1.G15 U1.G16 U1.G17 U1.G19 U1.G21 U1.G25 U1.G26 U1.H1 U1.H4 U1.H5 U1.H6 U1.H10 U1.H15 U1.H16 U1.H17 U1.H18 U1.H19 U1.H21 U1.H25 U1.H26 U1.H30 U1.J2 U1.J3 U1.J4 U1.J5 U1.J8 U1.J13 U1.J15 U1.J16 U1.J17 U1.J19 U1.J21 U1.J22 U1.J23 U1.J25 U1.J27 U1.J29 U1.K5 U1.K8 U1.K9 U1.K10 U1.K11 U1.K13 U1.K15 U1.K16 U1.K17 U1.K19 U1.K20 U1.K21 U1.K22 U1.K23 U1.K24 U1.K25 U1.K26 U1.L9 U1.L10 U1.L11 U1.L12 U1.L13 U1.L15 U1.L16 U1.L17 U1.L18 U1.L19 U1.L20 U1.L21 U1.L22 U1.L23 U1.P3 U1.P26 U1.R10 U1.R11 U1.R12 U1.R13 U1.R14 U1.R15 U1.R16 U1.R17 U1.R18 U1.R19 U1.R20 U1.R21 U1.R23 U1.T5 U1.T10 U1.T12 U1.T14 U1.T16 U1.T18 U1.T22 U1.T28 U1.U3 U1.U22 U1.V22 U1.V28 U1.W3 U1.W9 U1.W11 U1.W12 U1.W13 U1.W15 U1.W16 U1.W17 U1.W22 U1.Y2 U1.Y4 U1.Y5 U1.Y8 U1.Y9 U1.Y10 U1.Y12 U1.Y14 U1.Y15 U1.Y16 U1.Y22 U2.A3 U2.A10 U2.AB3 U2.AB5 U2.AB8 U2.AB10 U2.C1 U2.C5 U2.C8 U2.C12 U2.D2 U2.D4 U2.D9 U2.D11 U2.E1 U2.E5 U2.E8 U2.E12 U2.G1 U2.G3 U2.G5 U2.G8 U2.G10 U2.G12 U2.J1 U2.J3 U2.J10 U2.J12 U2.K2 U2.K4 U2.K9 U2.K11 U2.N2 U2.N4 U2.N9 U2.N11 U2.P1 U2.P3 U2.P10 U2.P12 U2.T1 U2.T3 U2.T5 U2.T8 U2.T10 U2.T12 U2.V1 U2.V5 U2.V8 U2.V12 U2.W2 U2.W4 U2.W9 U2.W11 U2.Y1 U2.Y5 U2.Y8 U2.Y12 U3.7 U3.18 U3.21 U3.25 U3.26 U4.A3 U4.A8 U4.A13 U4.B3 U4.B4 U4.B8 U4.B13 U4.B16 U4.C15 U4.D7 U4.D8 U4.D9 U4.D10 U4.D12 U4.D13 U4.E1 U4.E8 U4.E12 U4.E14 U4.F7 U4.F8 U4.F9 U4.G7 U4.G8 U4.G9 U4.G15 U4.G16 U4.H1 U4.H7 U4.H8 U4.H9 U4.H15 U4.J5 U4.J8 U4.L6 U4.L8 U4.L14 U4.M4 U4.N2 U4.N13 U4.P2 U4.R2 U5.7 U5.18 U5.21 U5.25 U5.26 U6.1 U6.28 U6.29 U6.30 U6.35 U6.41 U7.33
GPIO16: U1.AH17
GPS_I: U1.AJ11 U6.12
GPS_Q: U1.AH12 U6.10
HRST_B: U1.AC9 U6.2
NetC45_2: C45.2 U7.2
NetC46_2: C46.2 U7.29
NetC50_1: U4.F2
NetC50_2: U4.G2
NetC85_2: U4.D2
NetC87_1: U4.M12
NetC88_1: U4.M8
NetC89_2: U4.P6
NetC90_2: U6.6
NetC97_1: U3.17
NetC98_1: U5.17
NetD1_1: 
NetD1_2: U3.22
NetD2_1: 
NetD2_2: U3.23
NetD3_1: 
NetD3_2: U5.22
NetD4_1: 
NetD4_2: U5.23
NetIC3_A3: IC3.A3 U1.L28
NetIC3_A4: IC3.A4 U1.M29
NetIC3_A5: IC3.A5 U1.L29
NetIC3_B2: IC3.B2 U1.L27
NetIC3_B3: IC3.B3 U1.N29
NetIC3_B4: IC3.B4 U1.L30
NetIC3_B5: IC3.B5 U1.N30
NetIC3_B6: IC3.B6 U1.P30
NetIC3_H5: IC3.H5
NetIC3_K5: IC3.K5
NetJ2_1: J2.1 U5.20
NetJ2_2: J2.2 U5.16
NetJ2_3: J2.3 U5.15
NetJ3_1: J3.1 U3.20
NetJ3_2: J3.2 U3.16
NetJ3_3: J3.3 U3.15
NetJ10_1: J10.1 U4.H4
NetJ10_2: J10.2 U4.G4
NetJ10_3: J10.3 U4.H5
NetL1_1: U4.F15 U4.F16
NetL2_2: U4.A7 U4.B7
NetL3_1: U4.E9
NetL3_2: U4.A9 U4.B9
NetL4_1: U4.A4
NetL5_1: U4.A2 U4.B2
NetL6_1: U4.D14
NetL6_2: U4.A12 U4.B12
NetL7_1: U4.L15 U4.L16
NetL7_2: U4.D16
NetL8_2: U4.A14 U4.B14
NetL9_2: U4.J15
NetR1_1: 
NetR2_1: U4.G13
NetR3_1: U4.M13
NetR4_2: U4.E2
NetR8_1: U4.L12
NetR9_1: U4.L13
NetR10_1: U4.P3
NetR11_1: U4.P4
NetR13_2: U7.1
NetR15_1: U7.21
NetU1_AA26: U1.AA26 U4.J9
NetU1_AA29: U1.AA29 U4.J10
NetU1_AB29: U1.AB29 U4.H11
NetU1_AC27: U1.AC27 U4.G10
NetU1_AD27: U1.AD27 U4.F11
NetU1_AD28: U1.AD28 U4.F13
NetU1_AE28: U1.AE28 U4.G11
NetU1_AF22: U1.AF22 U5.1
NetU1_AF23: U1.AF23 U5.5
NetU1_AH22: U1.AH22 U3.1
NetU1_AH23: U1.AH23 U3.5
NetU1_F14: U1.F14 U2.T11
NetU1_W26: U1.W26 U4.L10
NetU1_Y26: U1.Y26 U4.L11
NetU1_Y27: U1.Y27 U4.K10
NetU1_Y29: U1.Y29 U4.J11
NetU1_Y30: U1.Y30 U4.H10
NetU4_N1: U4.N1 Y1.1
NetU4_P1: U4.P1 Y1.3
ODT_CA_a: U2.G2
ODT_CA_b: U2.T2
reset: U3.19 U5.19
RESETB: U1.AC30 U4.D4
RTC: U1.Y28 U4.F10
SRCLKEN_IN0: U1.AB27 U4.L7
SRCLKEN_IN1: U1.AB28 U4.J7
TOP_CLK: U1.AE9 U6.4
TOP_DATA: U1.AD9 U6.3
USB0_N: J1.2
USB0_P: J1.3
USB1_N: J5.2
USB1_P: J5.3
USB_0_N: U1.T29
USB_0_P: U1.T30
USB_1_N: U1.T25
USB_1_P: U1.T26
V_UART: U3.4 U5.4
VCORE: C1.2 C2.2 C3.2 C4.2 C5.2 C6.2 C7.2 C8.2 C9.2 C10.2 C11.2 C12.2 C13.2 C14.2 C15.2 C16.2 C17.2 C18.2 C19.2 C20.2 C21.2 C22.2 C23.2 C24.2 C25.2 C26.2 U1.P9 U1.P11 U1.P13 U1.P15 U1.P17 U1.P18 U1.P19 U1.P21 U1.P22 U1.U9 U1.U11 U1.U13 U1.U14 U1.U16 U1.U17 U1.V8 U1.V10 U1.V11 U1.V12 U1.V13 U1.V14 U1.V15 U1.V16 U1.V18 U4.C16
VDRAM1: U1.N13 U1.N15 U1.N17 U1.N19 U2.A4 U2.A9 U2.AB4 U2.AB9 U2.F5 U2.F8 U2.H1 U2.H5 U2.H8 U2.H12 U2.K1 U2.K3 U2.K10 U2.K12 U2.N1 U2.N3 U2.N10 U2.N12 U2.R1 U2.R5 U2.R8 U2.R12 U2.U5 U2.U8 U4.D11
VDRAM2: U1.M9 U1.M11 U1.M21 U1.M23 U2.AA3 U2.AA5 U2.AA8 U2.AA10 U2.B3 U2.B5 U2.B8 U2.B10 U2.D1 U2.D5 U2.D8 U2.D12 U2.F3 U2.F10 U2.U3 U2.U10 U2.W1 U2.W5 U2.W8 U2.W12 U4.P15
VEMC: IC3.E6 IC3.F5 IC3.J10 IC3.K9 U4.R11
VIO18: IC3.C6 IC3.M4 IC3.N4 IC3.P3 IC3.P5 U1.AB21 U1.AE2 U1.AH30 U1.J30 U2.F1 U2.F12 U2.G4 U2.G9 U2.T4 U2.T9 U2.U1 U2.U12 U4.F3
VMODEM: U4.D15
VPA: U4.D5
VPROC: C27.2 C28.2 C29.2 C30.2 C31.2 C32.2 C33.2 C34.2 C35.2 C36.2 C37.2 C38.2 C39.2 C40.2 C41.2 C42.2 C43.2 C44.2 U1.AA20 U1.AA21 U1.AA22 U1.AA23 U1.U21 U1.U23 U1.U24 U1.U28 U1.V20 U1.V24 U1.V25 U1.V27 U1.Y20 U1.Y21 U1.Y23 U1.Y24 U4.D6
VS1: U4.E7
VSRAM_OTHERS: U1.T9 U1.U19 U1.V19 U4.P12 U4.P14 U4.R13 U4.R14
VSYS: J9.1 U4.A5 U4.A6 U4.A10 U4.A11 U4.A15 U4.B1 U4.B6 U4.B10 U4.B11 U4.B15 U4.C1 U4.F14 U4.J16 U4.K12 U4.K15 U4.K16 U4.M11 U4.N11 U4.P7 U4.P9
WATCHDOG: U1.AB30 U4.F12
WB_PTA: U1.AB9 U6.5
WF_CTRL0: U1.AE8 U6.23
WF_CTRL1: U1.AF7 U6.22
WF_CTRL2: U1.AB8 U6.21
WF_IN: U1.AJ7 U6.19
WF_IP: U1.AJ6 U6.20
WF_QN: U1.AH8 U6.17
WF_QP: U1.AH7 U6.18
XIN_WBG: U1.Y13
XO_IN: U6.8
XTAL1: U7.31
XTAL2: U7.32